# Altium PCB 主板PCB第3次.PcbDoc
Units mil, origin at the board's own origin, x right, y up, seen from the top; angles counter-clockwise.
Board outline 10400 x 7050 mil, 2 copper layers (Top Layer, Bottom Layer); 77 components, 91 nets, 401 pads, 33 vias.
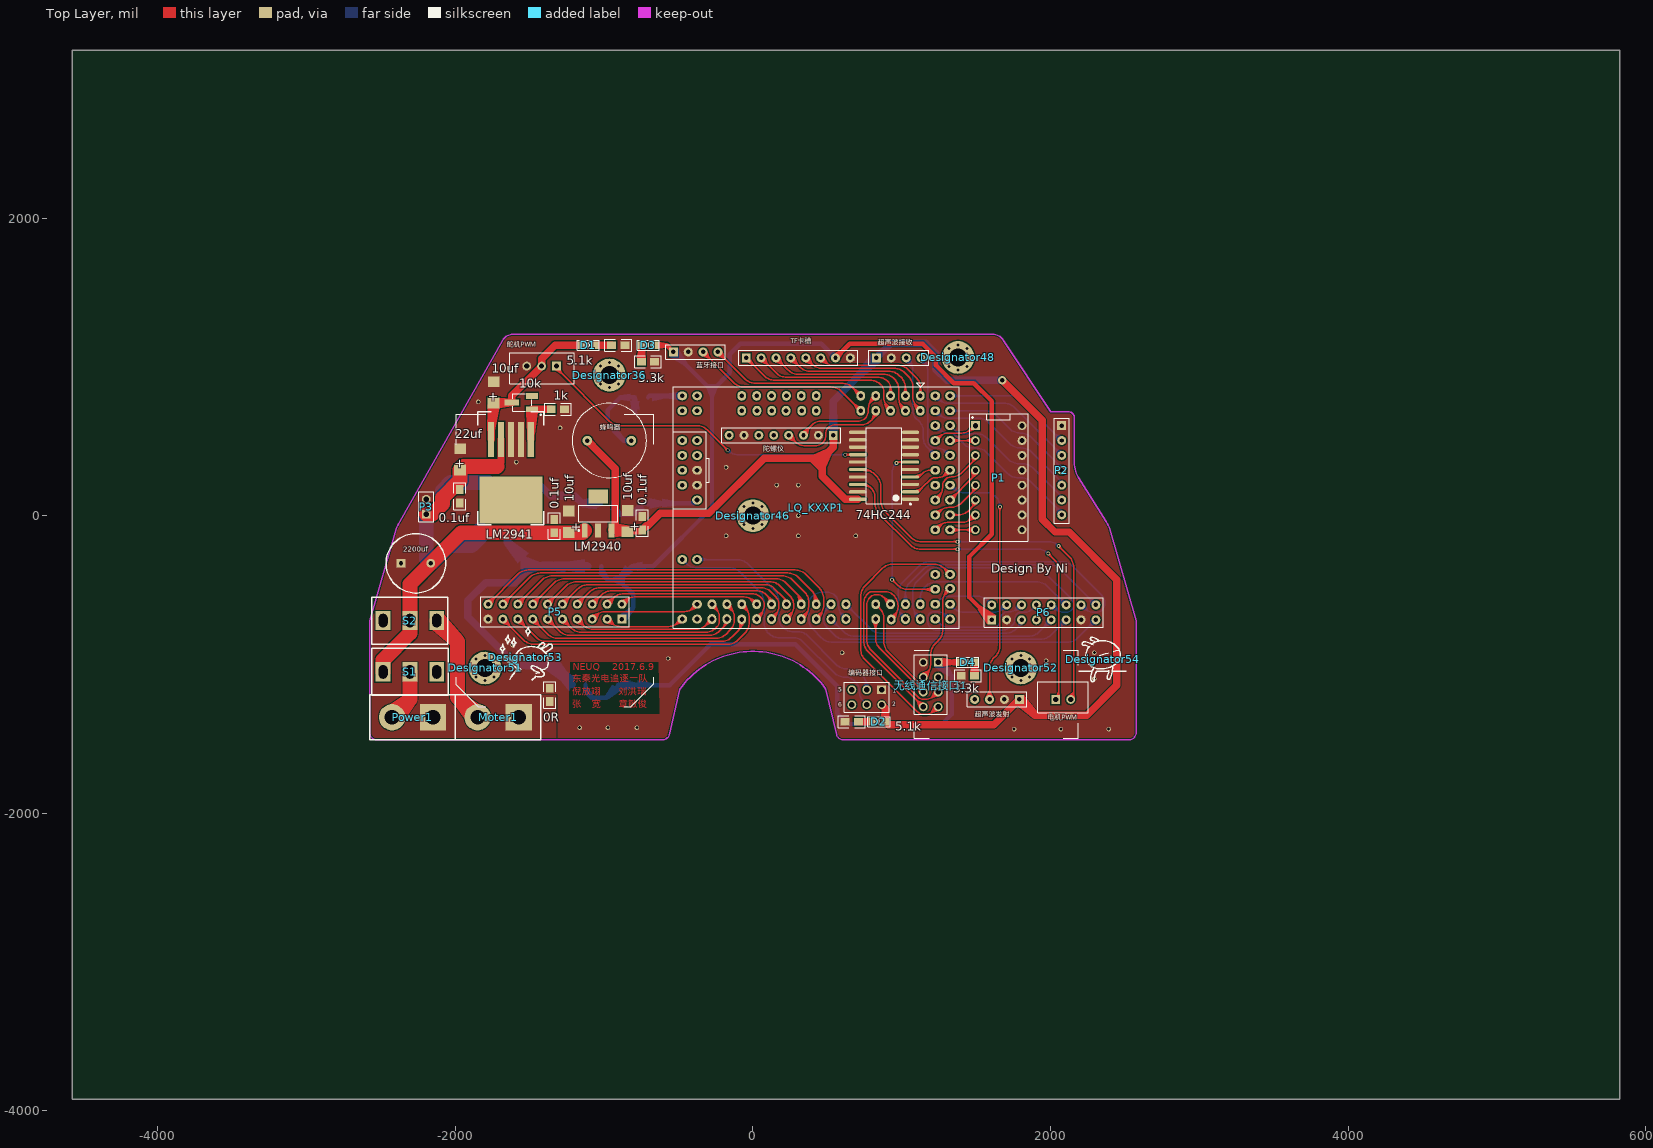
[diagram p0: Top Layer view]
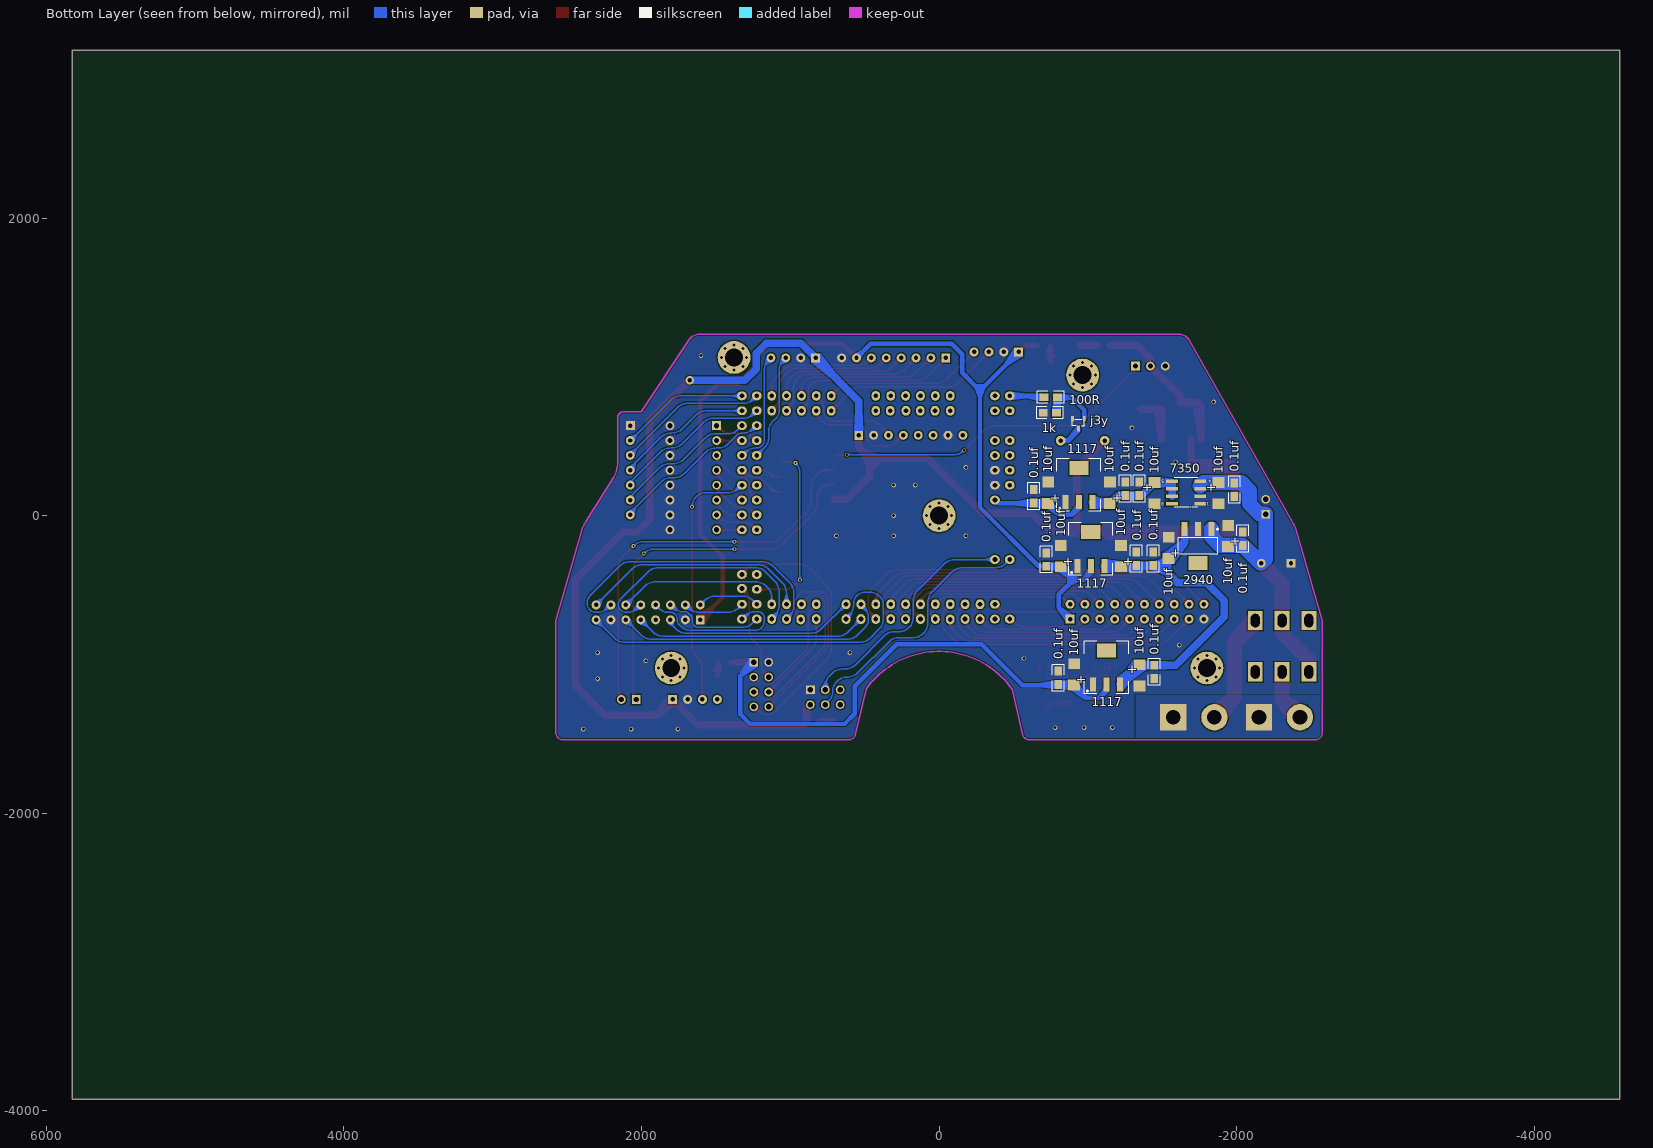
[diagram p1: Bottom Layer view, seen from below]

## Layer stack, top to bottom
Top Solder: solder mask 0.4, Solder Resist, Dk 3.5
Top Layer: signal copper 1.4
Dielectric 1: dielectric 12.6, FR-4, Dk 4.8
Bottom Layer: signal copper 1.4
Bottom Solder: solder mask 0.4, Solder Resist, Dk 3.5

## Board outline
-4574.49,-3922.05 -4574.49,3127.95 5825.51,3127.95 5825.51,-3922.05

## Design rules (kind name [scope] priority, off if disabled: settings)
Clearance [All] p1: gap=8
ComponentClearance [All] p1: gap=0 collisioncheckmode=3 verticalgap=0 showdistances=FALSE
HoleSize [All] p1: absolutevalues=TRUE maxlimit=200 minlimit=5 maxpercent=80.000 minpercent=20.000
PlaneClearance [All] p1: clearance=10
PlaneConnect [All] p1: planeconnectstyle=Direct reliefexpansion=20 reliefentries=4 reliefconductorwidth=10 reliefairgap=10
PolygonConnect [All] p1: connectstyle=Direct reliefconductorwidth=10 reliefentries=4 polygonreliefangle="90 Angle" airgapwidth=10
RoutingVias [All] p1: holewidth=15 width=25 viastyle="Through Hole" minholewidth=5 minwidth=10 maxholewidth=180 maxwidth=200
ShortCircuit [InNet('No Net') vs InNet('No Net')] p1: allowed=TRUE
SilkToSilkClearance [All] p1: silktosilkclearance=0
SolderMaskExpansion [All] p1: expansion=4
Width [All] p1: maxlimit=200 minlimit=8 preferedwidth=10
24 further rules are at their usual default settings.

## Classes and differential pairs
component class 主板原理图第3次: 0.1uf 0R 1k 3.3k 5.1k 10k 10uf 22uf 74HC244 100R 1117 2200uf 2940 7350 D1 D2 D3 D4 j3y LM2940 LM2941 LQ_KXXP1 Moter1 P1 P2 P3 P5 P6 Power1 S1 S2 TF卡槽 无线通信接口1 电机PWM 编码器接口 舵机PWM 蓝牙接口 蜂鸣器 超声波发射 超声波接收 陀螺仪

## Components (designator, comment, footprint, x,y, rotation, side; value= is the part's Value field where it differs from the comment)
0.1uf "C-0.1uf" 0805 -745,-95 r90 top (schematic designator C28)
0.1uf "C-0.1uf" 0805 -1335,-25 r270 top (schematic designator C27)
0.1uf "C-0.1uf" 0805 -1440,-245 r270 bottom (schematic designator C24)
0.1uf "C-0.1uf" 0805 -2040,-110 r270 bottom (schematic designator C23)
0.1uf "C-0.1uf" 0805 -1345,135 r90 bottom (schematic designator C20)
0.1uf "C-0.1uf" 0805 -1985,130 r90 bottom (schematic designator C19)
0.1uf "C-0.1uf" 0805 -800,-1045.32 r270 bottom (schematic designator C16)
0.1uf "C-0.1uf" 0805 -1445,-1005.32 r270 bottom (schematic designator C15)
0.1uf "C-0.1uf" 0805 -720,-250 r270 bottom (schematic designator C11)
0.1uf "C-0.1uf" 0805 -1325,-245 r270 bottom (schematic designator C10)
0.1uf "C-0.1uf" 0805 -1970,85 r90 top (schematic designator C7)
0.1uf "C-0.1uf" 0805 -635,175 r270 bottom (schematic designator C5)
0.1uf "C-0.1uf" 0805 -1250,225 r270 bottom (schematic designator C4)
0R "0欧电阻" 0805 -1365,-1160 r270 top (schematic designator R1)
1k "1k" 0805 -700.01,691.68 r180 bottom (schematic designator R5)
1k "1k" 0805 -1265,715 r180 top (schematic designator R3)
3.3k "3.3k" 0805 1400,-1075 r0 top (schematic designator R9)
3.3k "5.1k" 0805 -860,1145 r180 top (schematic designator R6)
5.1k "3.3k" 0805 -660,1035 r180 top (schematic designator R8)
5.1k "4.7k" 0805 620,-1385 r0 top (schematic designator R7)
10k "10K可调电阻" 10K贴片可调电阻 -1560,760 r90 top (schematic designator R2)
10uf "C-10uf钽电容" 10uf钽电容 -840,-40 r90 top (schematic designator C26)
10uf "C-10uf钽电容" 10uf钽电容 -1235,-44 r90 top (schematic designator C25)
10uf "C-10uf钽电容" 10uf钽电容 -1545,-220 r90 bottom (schematic designator C22)
10uf "C-10uf钽电容" 10uf钽电容 -1945,-140 r90 bottom (schematic designator C21)
10uf "C-10uf钽电容" 10uf钽电容 -1445,155 r270 bottom (schematic designator C18)
10uf "C-10uf钽电容" 10uf钽电容 -1875,155 r270 bottom (schematic designator C17)
10uf "C-10uf钽电容" 10uf钽电容 -910,-1070.32 r90 bottom (schematic designator C14)
10uf "C-10uf钽电容" 10uf钽电容 -1345,-1070.32 r270 bottom (schematic designator C13)
10uf "C-22uf钽电容" C-22uf钽电容 -1740,825 r90 top (schematic designator C12)
10uf "C-10uf钽电容" 10uf钽电容 -820,-275 r90 bottom (schematic designator C9)
10uf "C-10uf钽电容" 10uf钽电容 -1225,-275 r90 bottom (schematic designator C8)
10uf "C-10uf钽电容" 10uf钽电容 -735,150 r90 bottom (schematic designator C3)
10uf "C-10uf钽电容" 10uf钽电容 -1150,150 r90 bottom (schematic designator C2)
22uf "C-22uf钽电容" C-22uf钽电容 -1965,375 r90 top (schematic designator C6)
74HC244 "74HC244" 74HC244 880,340 r180 top (schematic designator U1)
100R "100R" 0805 -705.01,795 r180 bottom (schematic designator R4)
1117 "LM1117-3.3V" LM1117 -1125,-1020.32 r90 bottom (schematic designator U5)
1117 "LM1117-3.3V" LM1117 -1020,-225 r90 bottom (schematic designator U3)
1117 "LM1117-3.3V" LM1117 -940,205 r90 bottom (schematic designator U2)
2200uf "C-470uf电解电容" C-470uF电解电容 -2265,-320 r0 top (schematic designator C1)
2940 "LM2940-TO-223-5V" lm2940-sot223 -1740,-205 r270 bottom (schematic designator U7)
7350 "TPS7350" TPS7350 -1660,155 r0 bottom (schematic designator U6)
D1 "" LED-0805 -1105,1145 r0 top
D2 "" LED-0805 845,-1385 r180 top
D3 "" LED-0805 -705,1145 r180 top
D4 "" LED-0805 1445,-985 r0 top
Designator36 "Comment" 螺丝固定过孔 -964.57,944.88 r0 top
Designator46 "Comment" 螺丝固定过孔 0,0 r0 top
Designator48 "Comment" 螺丝固定过孔 1377.95,1062.99 r0 top
Designator51 "Comment" 螺丝固定过孔 -1800,-1023.62 r0 top
Designator52 "Comment" 螺丝固定过孔 1800,-1023.62 r0 top
Designator53 "Comment" TUSIJI_2 -1530,-950 r0 top
Designator54 "Comment" TUSIJI_3 2350,-965 r0 top
j3y "QNPN" J3Y晶体管 -940,620 r0 bottom (schematic designator Q1)
LM2940 "LM2940-TO-223-5V" lm2940-sot223 -1040,15 r90 top (schematic designator U8)
LM2941 "LM2941" LM2941 -1625,310 r270 top (schematic designator U4)
LQ_KXXP1 "LQ_KXXP144-SYSVG" LQ_KXXP144-SYSVG 1125,805 r180 top
Moter1 "驱动接口" 14AWG接口x2 -1575,-1355 r180 top
P1 "拨码开关8位" 拨码开关8位 1495,605 r0 top
P2 "6位按键接口" HDR7X1 2075,605 r270 top
P3 "数码管接口" HDR2X1 -2195,10 r90 top
P5 "山外LCD" 山外LCD插座 -1995,-1285 r0 top
P6 "鹰眼、总钻风MT9V032" 总钻风MT9V032 1605,-600 r0 top
Power1 "电源接口" 14AWG接口x2 -2150,-1355 r180 top
S1 "三脚开关" 大开关 -2305,-1050 r180 top
S2 "三脚开关" 大开关 -2305,-705 r0 top
TF卡槽 "TF卡槽接口" HDR8X1 -45,1060 r0 top (schematic designator P4)
无线通信接口1 "无线通信接口" 无线通信接口 1085,-905 r270 top
电机PWM "电机接口1" 白插座2X1 2035,-1235 r0 top (schematic designator 电机接口1)
编码器接口 "编码器接口" 编码器接口 765,-1220 r180 top (schematic designator 编码器接口1)
舵机PWM "舵机接口" 白插座3X1 -1320,1005 r180 top (schematic designator 舵机接口1)
蓝牙接口 "蓝牙串口接口" 蓝牙串口接口 -535,1100 r0 top (schematic designator 蓝牙接口1)
蜂鸣器 "Buzzer" 蜂鸣器 -965,505 r0 top (schematic designator 蜂鸣器1)
超声波发射 "逐飞超声波发射接口" 逐飞超声波发射接口 1790,-1235 r180 top (schematic designator 超声波发射1)
超声波接收 "逐飞超声波接收接口" 逐飞超声波接收接口 830,1060 r0 top (schematic designator 超声波接收1)
陀螺仪 "mpu6050接口" mpu6050接口 540,540 r180 top (schematic designator 陀螺仪1)

## Footprints (in the part's own frame and the unit in brackets; to place one, negate y for a bottom-side part, rotate by r counter-clockwise, add the part's x,y. Pads: shape width x height; smd on the part's side, far side on the other; paste and mask are expansions set on the pad)
10K贴片可调电阻 [mm]
  rect 1x2 smd paste-0.025 mask+0: 1(-1.143,-1.905) 3(1.143,-1.905)
  rect 1x2.5 smd paste-0.025 mask+0: 2(0,1.524)
  silkscreen extent -1.52,-1.91 1.52,1.4
10uf钽电容 [mil]
  rect 72.99x78.74 smd: 1(-68,3) 2(75,2)
14AWG接口x2 [mm] "电源洞洞"
  rect 4.5x4.5 hole 2.5: 1(-0.015,0)
  round 4.5 hole 2.5: 2(6.985,0)
  silkscreen extent -3.81,-3.81 10.79,3.81
74HC244 [mm]
  oval 3x0.55 smd: 1(-4.525,5.842) 2(-4.525,4.572) 3(-4.525,3.302) 4(-4.525,2.032) 5(-4.525,0.762) 6(-4.525,-0.508) 7(-4.525,-1.778) 8(-4.525,-3.048) 9(-4.525,-4.318) 10(-4.525,-5.588) 11(4.475,-5.588) 12(4.475,-4.318) 13(4.475,-3.048) 14(4.475,-1.778) 15(4.475,-0.508) 16(4.475,0.762) 17(4.475,2.032) 18(4.475,3.302) 19(4.475,4.572) 20(4.475,5.842)
  silkscreen extent -4.65,-6.37 3,6.79, body extent -3.82,-6.38 3.77,6.63, height 2.64
0805 [mil]
  rect 60x50 smd: 1(0,0) 2(90,0)
  silkscreen extent -45,-40 135,40
C-22uf钽电容 [mil]
  rect 72.99x78.74 smd: 1(-68,3) 2(75,2)
C-470uF电解电容 [mil] "可用于470uF,1000uF,2200uF"
  rect 60x60 hole 30: 1(-100,0)
  round 60 hole 30: 2(100,0)
  silkscreen extent -200,-200 200,200
HDR2X1 [mm] "Connector; Header; 2 Position"
  rect 1.5x1.5 hole 0.9: 1(0,0)
  round 1.5 hole 0.9: 2(2.54,0)
  silkscreen extent -1.27,-1.27 3.81,1.27
HDR7X1 [mil]
  rect 60x60 hole 30: 1(0,0)
  round 60 hole 30: 2(100,0) 3(200,0) 4(300,0) 5(400,0) 6(500,0) 7(600,0)
  silkscreen extent -50,-50 655,50
HDR8X1 [mil]
  rect 60x60 hole 30: 1(0,0)
  round 60 hole 30: 2(100,0) 3(200,0) 4(300,0) 5(400,0) 6(500,0) 7(600,0) 8(700,0)
  silkscreen extent -50,-50 750,50
J3Y晶体管 [mm]
  rect 0.5x1 smd: 1(-0.9,-0.8) 2(1.1,-0.8) 3(0.1,0.9)
  silkscreen extent -0.87,-0.63 1.15,0.45
LED-0805 [mm]
  rect 1.4x1.27 smd: 1(-1.143,0) 2(1.067,0)
  silkscreen extent -1.94,-0.89 1.87,0.89
LM1117 [mm]
  rect 2.4x1 smd: 1(-2.9,2.3) 2(-2.9,0) 3(-2.9,-2.3)
  rect 2.4x3.3 smd: 4(2.9,0)
  silkscreen extent -4.47,-3.76 4.47,3.76, body extent -1.85,-3.35 1.85,3.35, height 1.8
lm2940-sot223 [mm]
  rect 2.4x1 smd: 1(-2.9,2.3) 2(-2.9,0) 3(-2.9,-2.3)
  rect 2.4x3.3 smd: 4(2.9,0)
  silkscreen extent -3.02,-3.35 1.4,3.47, body extent -1.85,-3.35 1.85,3.35, height 1.8
LM2941 [mm]
  rect 6x1.07 smd: 1(-5.133,3.376) 2(-5.133,1.676) 3(-5.133,-0.024) 4(-5.133,-1.724) 5(-5.133,-3.424)
  rect 8x10.8 smd: 6(5.225,-0.024)
  silkscreen extent -9.86,-5.66 9.44,5.61, body extent -4.65,-5.23 4.24,5.18, height 4.65
LQ_KXXP144-SYSVG [mil]
  oval 59x66 hole 32: 1(0,0) 2(0,100) 3(100,0) 4(100,100) 5(200,0) 6(200,100) 7(300,0) 8(300,100) 9(400,0) 10(400,100) 15(700,0) 16(700,100) 17(800,0) 18(796.85,100) 19(900,0) 20(902.36,100) 21(1000,0) 22(998.82,100) 23(1100,0) 24(1097.64,100) 25(1200,0) 26(1200.39,100) 63(1400,1500) 64(1400,1400) 65(1300,1500) 66(1300,1400) 67(1200,1501.97) 68(1200,1400) 69(1100,1500) 70(1100,1400) 71(1000,1500) 72(1000,1400) 73(900,1500) 74(900,1400) 75(800,1500) 76(800,1400) 77(700,1500) 78(700,1400) 79(600,1500) 80(600,1400) 81(500,1500) 82(500,1400) 85(300,1500) 86(300,1400) 87(194.88,1502.36) 88(200,1400) 89(100,1500) 90(100,1400) 91(0,1500) 92(0,1400)
  oval 66x59 hole 32: 31(1500,0) 32(1600,0) 33(1500,100) 34(1600,100) 37(1500,300) 38(1600,300) 39(1500,400.79) 40(1600,400) 41(1500,500) 42(1600,500.39) 43(1500,600) 44(1600,600) 45(1500,700) 53(1500,1100) 54(1600,1100) 59(1500,1400) 61(1500,1500) 62(1600,1500) 93(-100,1500) 94(-200,1500) 95(-100,1400) 96(-200,1400) 97(-100,1300) 98(-200,1294.09) 99(-100,1200) 100(-200,1200) 105(-100,899.61) 106(-200,900.39) 107(-100,800) 108(-200,800) 109(-100,700) 110(-200,700) 111(-100,600) 112(-200,600) 113(-100,500) 114(-200,500) 115(-100,400) 116(-200,400) 117(-100,300) 118(-200,300) 119(-100,200) 120(-200,200) 121(-100,100) 122(-200,100) 123(-100,0) 124(-200,0)
  silkscreen extent -260,-87 1660,1560
mpu6050接口 [mil]
  rect 60x60 hole 30: 1(0,0)
  round 60 hole 30: 2(100,0) 3(200,0) 4(300,0) 5(400,0) 6(500,0) 7(600,0) 8(700,0)
  silkscreen extent -50,-50 750,50
TPS7350 [mm]
  rect 2x0.6 smd paste-0.025 mask+0: 1(-2.4,1.905) 2(-2.4,0.635) 3(-2.4,-0.635) 4(-2.4,-1.905) 5(2.4,-1.905) 6(2.4,-0.635) 7(2.4,0.635) 8(2.4,1.905)
  silkscreen extent -2,-2.5 2,2.5
TUSIJI_2 [mil] "TSJ"
  silkscreen extent -168,-155 182,205
TUSIJI_3 [mil] "TSJ"
  silkscreen extent -159,-150 158,149
大开关 [mil]
  rect 100x130 hole 60 slot 90 at 90 deg: 1(-180,0) 2(0,0) 3(180,0)
  silkscreen extent -257,-159 255,155
山外LCD插座 [mil]
  rect 60x60 hole 30: 1(1115,590)
  round 60 hole 30: 2(1015,590) 3(915,590) 4(815,590) 5(715,590) 6(615,590) 7(515,590) 8(415,590) 9(315,590) 10(215,590) 11(215,690) 12(315,690) 13(415,690) 14(515,690) 15(615,690) 16(715,690) 17(815,690) 18(915,690) 19(1015,690) 20(1115,690)
  silkscreen extent 0,0 1330,1965
总钻风MT9V032 [mil]
  rect 60x60 hole 30: 1(0,-100)
  round 60 hole 30: 2(100,-100) 3(200,-100) 4(300,-100) 5(400,-100) 6(500,-100) 7(600,-100) 8(700,-100) 9(700,0) 10(600,0) 11(500,0) 12(400,0) 13(300,0) 14(200,0) 15(100,0) 16(0,0)
  silkscreen extent -50,-150 750,50
拨码开关8位 [mm]
  rect 1.5x1.5 hole 0.9: 1(0,0)
  round 1.5 hole 0.9: 2(0,-2.54) 3(0,-5.08) 4(0,-7.62) 5(0,-10.16) 6(0,-12.7) 7(0,-15.24) 8(0,-17.78) 9(7.958,-17.786) 10(7.958,-15.246) 11(7.958,-12.706) 12(7.958,-10.166) 13(7.958,-7.626) 14(7.958,-5.086) 15(7.958,-2.546) 16(7.958,-0.006)
  silkscreen extent -1.04,-19.71 8.96,1.99
无线通信接口 [mm]
  rect 1.5x1.5 hole 0.9: 1(2.032,4.064)
  round 1.5 hole 0.9: 2(4.572,4.064) 3(7.112,4.064) 4(9.652,4.052) 5(9.652,1.512) 6(7.112,1.524) 7(4.572,1.524) 8(2.032,1.524)
  silkscreen extent 0,0 14.99,27.94
白插座2X1 [mm] "Connector; Header; 3 Position"
  rect 1.5x1.5 hole 0.9: 1(0,0)
  round 1.5 hole 0.9: 2(2.54,0)
  silkscreen extent -3.05,-2.29 5.59,3.05
白插座3X1 [mm] "Connector; Header; 3 Position"
  rect 1.5x1.5 hole 0.9: 1(0,0)
  round 1.5 hole 0.9: 2(2.54,0) 3(5.08,0)
  silkscreen extent -3,-2.27 8,3
编码器接口 [mm]
  rect 1.5x1.5 hole 0.9: 1(-2.54,-1.27)
  round 1.5 hole 0.9: 2(-2.54,1.27) 3(0,-1.27) 4(0,1.27) 5(2.54,-1.27) 6(2.54,1.27)
  silkscreen extent -3.81,-2.54 3.81,2.54
蓝牙串口接口 [mil]
  rect 60x60 hole 30: 1(0,0)
  round 60 hole 30: 2(100,0) 3(200,0) 4(300,0)
  silkscreen extent -50,-50 350,50
蜂鸣器 [mil]
  round 65 hole 30: 1(-148,-0.98) 2(148,-0.98)
  silkscreen extent -250,-250 250,250
螺丝固定过孔 [mil] "螺丝固定过孔"
  round 30 hole 20: 1(-85,0) 1(-60,-60) 1(-60,60) 1(0,-85) 1(0,85) 1(60,-60) 1(60,60) 1(85,0)
  round 220 hole 120 unplated: 1(0,0)
逐飞超声波发射接口 [mil]
  rect 60x60 hole 30: 1(0,0)
  round 60 hole 30: 2(100,0) 3(200,0) 4(300,0)
  silkscreen extent -50,-50 350,50
逐飞超声波接收接口 [mil]
  rect 60x60 hole 30: 1(0,0)
  round 60 hole 30: 2(100,0) 3(200,0) 4(300,0)
  silkscreen extent -50,-50 350,50

## Part data
0.1uf 0.1uf 0.1uf 0.1uf 0.1uf 0.1uf 0.1uf 0.1uf 0.1uf 0.1uf 0.1uf 0.1uf 0.1uf: "Capacitor"
0R 1k 1k 3.3k 3.3k 5.1k 5.1k 100R: library part R-0805
10k: library part 可调电阻
10uf 10uf 10uf 10uf 10uf 10uf 10uf 10uf 10uf 10uf 10uf 10uf 10uf 22uf: "Polarized Capacitor (Axial)"
74HC244: "内置三态门 用于隔离"
1117 1117 1117: library part LM1117
2200uf: "Polarized Capacitor (Surface Mount)"
2940: library part LM2940-TO-223
D1 D2 D3 D4: library part 发光二极管, "发光二极管"
j3y: library part dynatron, "NPN型三极管"
LM2940: library part LM2940
Moter1: library part 电源接口
P2: library part Header7X1, "Header, 7-Pin"
P3 电机PWM: library part Header2X1, "Header, 2-Pin, Right Angle"
P5 无线通信接口1: "Header, 4-Pin, Dual row"
P6: library part 总钻风MT9V032, "Header, 4-Pin, Dual row"
TF卡槽: library part Header8X1, "Header, 8-Pin"
舵机PWM: library part Header3X1, "Header, 3-Pin"
蓝牙接口 超声波发射 超声波接收: "Header, 4-Pin"
蜂鸣器: "Magnetic Transducer Buzzer"
陀螺仪: "Header, 8-Pin"

## Via types
v1: diameter 30, hole 20, Top Layer to Bottom Layer, 23 vias
v2: diameter 25, hole 15, Top Layer to Bottom Layer, 9 vias
v3: diameter 55, hole 30, Top Layer to Bottom Layer, 1 vias

## Nets (pads, with @x,y where several pads share a name; then routed paths per layer and width w, separated by ;. In a path a pad name is that pad's centre, name@x,y a point inside that pad or via, vN(x,y) a via of type N, cw(c..) or ccw(c..) an arc to the next point about the centre after c; other vN are vias at no path point)
1PWM+: 74HC244.18 电机PWM.1 | length 2533.9
  Top Layer w10: 74HC244.18 734.64,210 cw(c734.64,124.64) 795,185 cw(c734.64,124.64) 820,124.64 820,81.42 ccw(c920,81.42) 849.29,10.71 1055.71,-195.71 ccw(c1126.42,-125) 1126.42,-225 v2(1375,-225) ; v2(1984.29,-254.29) 2025.71,-295.71 cw(c1955,-366.42) 2055,-366.42 2055,-1186.72 cw(c1986.72,-1186.72) 电机PWM.1
  Bottom Layer w10: v2(1375,-225) 1913.58,-225 cw(c1913.58,-325) v2(1984.29,-254.29)
1PWM-: 74HC244.16 电机PWM.2 | length 2720.9
  Top Layer w10: 74HC244.16 743.58,310 cw(c743.58,210) 814.29,280.71 830.71,264.29 cw(c760,193.58) 860,193.58 860,96.42 ccw(c960,96.42) 889.29,25.71 1060.71,-145.71 ccw(c1131.42,-75) 1131.42,-175 v2(1375,-175) ; v2(2054.29,-204.29) 2125.71,-275.71 cw(c2055,-346.42) 2155,-346.42 2155,-1186.72 cw(c2086.72,-1186.72) 电机PWM.2
  Bottom Layer w10: v2(1375,-175) 1983.58,-175 cw(c1983.58,-275) v2(2054.29,-204.29)
3.3V_1: 0.1uf.2@-720,-340 10uf.1@-817,-343 1117.2@-1020,-339.17 D3.1 P5.1 P6.1 TF卡槽.7 蓝牙接口.1 | length 6592.1
  Top Layer w30: D3.1 -580,1145 蓝牙接口.1 ; TF卡槽.7 650,1155 1140,1155 1230,1065 1230,1010 1350,890 1485,890 1605,770 1605,-125 1455,-275 1455,-550 P6.1
  Bottom Layer w30: 1117.2@-1020,-339.17 -1020,-385 -975,-430 -904,-430 ; P5.1 -805,-620 -805,-529 -904,-430 ; 蓝牙接口.1 -275,840 ; TF卡槽.7 460,1155 -85,1155 -155,1085 -155,960 -275,840 ; -904,-430 -817,-343 -723,-343 -720,-340 -670,-340 -275,55 -275,840
3.3V_2: 0.1uf.2@-800,-1135.32 10uf.1@-907,-1138.32 1117.2@-1125,-1134.49 D4.1 无线通信接口1.1 | length 3577.5
  Top Layer w30: 无线通信接口1.1 D4.1
  Bottom Layer w30: 1117.2@-1125,-1134.49 -1125,-1180 -1080,-1225 -985,-1225 -907,-1147 -907,-1138.32 -558.31,-1138.32 -285,-865 285,-865 566.49,-1146.49 566.49,-1331.49 635,-1400 1270,-1400 1335,-1335 1335,-1075 无线通信接口1.1
5V_1: 0.1uf.1@-1345,135 0.1uf.2@-1250,135 10uf.1@-1147,82 10uf.1@-1448,223 1117.3@-1030.55,90.83 7350.5 7350.6 7350.7 | length 688.7
  Bottom Layer w50: 7350.7 7350.6 -1565.51,220.75 -1563.26,223 -1448,223 -1360,135 -1345,135 -1250,135 -1200,135 -1147,82 -1039.38,82 1117.3@-1030.55,90.83
5V_2: 0.1uf.1@-745,-95 10uf.1@-843,-108 74HC244.20 D2.1 LM2940.3 编码器接口.2 蜂鸣器.1 超声波发射.1 超声波接收.1 陀螺仪.1 | length 8916.9
  Top Layer w50: 蜂鸣器.1 -925,316.02 -925,-74.72 LM2940.3 -749.17,-99.17 -745,-95 -718,-68 -706.33,-68 -623.33,15 -295,15 75,385 465,385 ; 陀螺仪.1 540,460 465,385 ; 74HC244.20 620,110 465,265 465,385 ; 编码器接口.2 889.99,-1294.99 D2.1 909.99,-1405 1620,-1405 超声波发射.1 1895,-1340 2245,-1340 2445,-1140 2445,-430 2125,-110 2030,-110 1945,-25 1945,640 v3(1675,910)
  Bottom Layer w50: 陀螺仪.1 540,770 超声波接收.1 930,1160 1160,1160 1230,1090 1230,985 1305,910 v3(1675,910)
5V_3: 0.1uf.1@-1445,-1005.32 0.1uf.2@-1325,-335 0.1uf.2@-1440,-335 10uf.1@-1222,-343 10uf.1@-1348,-1002.32 10uf.1@-1542,-288 1117.3@-1110.55,-339.17 1117.3@-1215.55,-1134.49 2940.3 | length 2211.8
  Bottom Layer w50: 2940.3 -1649.45,-180.55 -1542,-288 -1490.83,-339.17 ; 1117.3@-1215.55,-1134.49 -1344.72,-1005.32 -1445,-1005.32 -1589.68,-1005.32 -1915,-680 -1915,-570 -1795,-450 -1601.65,-450 -1490.83,-339.17 ; 1117.3@-1110.55,-339.17 -1490.83,-339.17
6V: 10k.2 10uf.1@-1743,757 D1.1 LM2941.5 舵机PWM.2 | length 1061.2
  Top Layer w50: LM2941.5 -1759.8,740.2 -1743,757 -1740,760 10k.2 -1620,805 舵机PWM.2 -1420,1055 -1330,1145 D1.1
7.2V: 0.1uf.2@-1335,-115 0.1uf.2@-1970,175 0.1uf.2@-1985,220 0.1uf.2@-2040,-200 10uf.1@-1238,-112 10uf.1@-1878,223 10uf.1@-1942,-208 22uf.1 2200uf.2 2940.1 7350.3 7350.4 LM2940.1 LM2941.4 P3.1 S1.3 S2.2 | length 4245.8
  Top Layer w50: -1720,330 -1692.87,357.13 LM2941.4
  Top Layer w100: S1.3 -2485,-970 -2305,-790 S2.2 -2305,-460 2200uf.2 -1960,-115 -1335,-115 -1146.38,-115 LM2940.1 ; P3.1 -2155,10 -2085,80 -2085,120 -1968,237 22uf.1 -1945,330 -1720,330
  Bottom Layer w100: 2940.1 -1830.55,-140.55 -1890,-200 -2040,-200 -2160,-320 2200uf.2 -2195,-290 P3.1 -2155,10 -2085,80 -2085,170 -2032,223 -1878,223 -1777.68,223 -1754.49,199.81
A10: LQ_KXXP1.53 编码器接口.3 | length 1618.6
  Bottom Layer w10: LQ_KXXP1.53 -106.42,-295 cw(c-106.42,-395) -35.71,-324.29 145.71,-505.71 cw(c75,-576.42) 175,-576.42 175,-688.64 ccw(c262.78,-688.64) 200.71,-750.71 ccw(c271.42,-680) 271.42,-780 305,-780 cw(c305,-864.5) 364.75,-804.75 560.71,-1000.71 ccw(c631.42,-930) 631.42,-1030 648.58,-1030 cw(c648.58,-1130) 719.29,-1059.29 735.71,-1075.71 cw(c665,-1146.42) 765,-1146.42 编码器接口.3
A11: LQ_KXXP1.54 编码器接口.4 | length 1775.1
  Bottom Layer w10: LQ_KXXP1.54 -449.29,-320.71 ccw(c-378.58,-250) -378.58,-350 -156.42,-350 cw(c-156.42,-450) -85.71,-379.29 45.71,-510.71 cw(c-25,-581.42) 75,-581.42 75,-718.58 ccw(c175,-718.58) 104.29,-789.29 105.71,-790.71 ccw(c176.42,-720) 176.42,-820 268.58,-820 cw(c268.58,-920) 339.29,-849.29 545.71,-1055.71 ccw(c616.42,-985) 616.42,-1085 620,-1085 cw(c620,-1169.5) 679.75,-1109.75 690.25,-1120.25 cw(c630.5,-1180) 715,-1180 ccw(c811.57,-1180) 743.28,-1248.28 编码器接口.4
A16: LQ_KXXP1.59 P5.3 | length 737.8
  Top Layer w10: P5.3 -1059.29,-674.29 cw(c-988.58,-745) -988.58,-645 -466.42,-645 ccw(c-466.42,-545) -395.71,-615.71 LQ_KXXP1.59
A19: LQ_KXXP1.62 P5.2 | length 537.8
  Top Layer w10: P5.2 -959.29,-715.71 ccw(c-888.58,-645) -888.58,-745 -566.42,-745 ccw(c-566.42,-645) -495.71,-715.71 LQ_KXXP1.62
A24: LQ_KXXP1.64 P5.5 | length 1255.3
  Top Layer w10: P5.5 -1219.29,-755.71 ccw(c-1148.58,-685) -1148.58,-785 -321.42,-785 ccw(c-321.42,-685) -250.71,-755.71 -242.68,-747.68 ccw(c-285.36,-705) -225,-705 -225,-686.42 ccw(c-325,-686.42) -254.29,-615.71 LQ_KXXP1.64
A25: LQ_KXXP1.63 P5.4 | length 954.4
  Top Layer w10: P5.4 -1139.29,-735.71 ccw(c-1068.58,-665) -1068.58,-765 -386.42,-765 ccw(c-386.42,-665) -315.71,-735.71 LQ_KXXP1.63
A26: LQ_KXXP1.66 P5.7 | length 1592.6
  Top Layer w10: P5.7 -1379.29,-795.71 ccw(c-1308.58,-725) -1308.58,-825 -251.42,-825 ccw(c-251.42,-725) -180.71,-795.71 -154.29,-769.29 ccw(c-225,-698.58) -125,-698.58 -125,-686.42 ccw(c-225,-686.42) -154.29,-615.71 LQ_KXXP1.66
A27: LQ_KXXP1.65 P5.6 | length 1302
  Top Layer w10: P5.6 -1299.29,-775.71 ccw(c-1228.58,-705) -1228.58,-805 -296.42,-805 ccw(c-296.42,-705) -225.71,-775.71 -196.21,-746.21 ; -196.21,-746.21 ccw(c-247.43,-695) LQ_KXXP1.65
A28: LQ_KXXP1.68 P5.9 | length 1937.4
  Top Layer w10: P5.9 -1539.29,-835.71 ccw(c-1468.58,-765) -1468.58,-865 -171.42,-865 ccw(c-171.42,-765) -100.71,-835.71 -54.29,-789.29 ccw(c-125,-718.58) -25,-718.58 -25,-686.42 ccw(c-125,-686.42) -54.29,-615.71 LQ_KXXP1.68
A29: LQ_KXXP1.67 P5.8 | length 1646
  Top Layer w10: P5.8 -1459.97,-815.03 ccw(c-1389.26,-744.31) -1389.26,-844.31 -210.74,-844.32 ccw(c-210.74,-744.31) -140.03,-815.03 -104.29,-779.29 ccw(c-175,-708.58) -75,-708.58 LQ_KXXP1.67
B0: LQ_KXXP1.70 P5.20 | length 937.8
  Top Layer w10: P5.20 -859.29,-574.29 cw(c-788.58,-645) -788.58,-545 -66.42,-545 cw(c-66.42,-645) 4.29,-574.29 LQ_KXXP1.70
B1: LQ_KXXP1.69 P5.19 | length 1233.5
  Top Layer w10: P5.19 -939.29,-554.29 cw(c-868.58,-625) -868.58,-525 -5.36,-525 cw(c-5.36,-610.36) 55,-550 57.32,-552.32 cw(c14.64,-595) 75,-595 75,-603.58 cw(c-25,-603.58) 45.71,-674.29 LQ_KXXP1.69
B2: LQ_KXXP1.72 P5.18 | length 1285.4
  Top Layer w10: P5.18 -1019.29,-534.29 cw(c-948.58,-605) -948.58,-505 23.58,-505 cw(c23.58,-605) 94.29,-534.29 103.79,-543.79 ; 103.79,-543.79 cw(c52.57,-595) LQ_KXXP1.72
B3: LQ_KXXP1.71 P5.17 | length 1568.2
  Top Layer w10: P5.17 -1099.29,-514.29 cw(c-1028.58,-585) -1028.58,-485 60,-485 cw(c60,-569.5) 119.75,-509.75 147.72,-537.72 cw(c81.86,-603.58) 175,-603.58 cw(c75,-603.58) 145.71,-674.29 LQ_KXXP1.71
B4: LQ_KXXP1.74 P5.16 | length 1617.3
  Top Layer w10: P5.16 -1179.29,-494.29 cw(c-1108.58,-565) -1108.58,-465 90,-465 cw(c90,-537.43) 141.21,-486.21 207.32,-552.32 cw(c164.64,-595) LQ_KXXP1.74
B5: LQ_KXXP1.73 P5.15 | length 1900.8
  Top Layer w10: P5.15 -1259.29,-474.29 cw(c-1188.58,-545) -1188.58,-445 115,-445 cw(c115,-541.57) 183.28,-473.28 247.72,-537.72 cw(c181.86,-603.58) 275,-603.58 cw(c175,-603.58) 245.71,-674.29 LQ_KXXP1.73
B6: LQ_KXXP1.76 P5.14 | length 1957.2
  Top Layer w10: P5.14 -1339.29,-454.29 cw(c-1268.58,-525) -1268.58,-425 160,-425 cw(c160,-509.5) 219.75,-449.75 296.72,-526.72 cw(c228.43,-595) LQ_KXXP1.76
B7: LQ_KXXP1.75 P5.13 | length 2248.1
  Top Layer w10: P5.13 -1419.29,-434.29 cw(c-1348.58,-505) -1348.58,-405 198.58,-405 cw(c198.58,-505) 269.29,-434.29 345.71,-510.71 cw(c275,-581.42) 375,-581.42 375,-603.58 cw(c275,-603.58) 345.71,-674.29 LQ_KXXP1.75
B8: LQ_KXXP1.78 P5.12 | length 2301.2
  Top Layer w10: P5.12 -1499.29,-414.29 cw(c-1428.58,-485) -1428.58,-385 233.58,-385 cw(c233.58,-485) 304.29,-414.29 395.71,-505.71 cw(c325,-576.42) 425,-576.42 LQ_KXXP1.78
B9: LQ_KXXP1.77 P5.11 | length 2595.9
  Top Layer w10: P5.11 -1579.29,-394.29 cw(c-1508.58,-465) -1508.58,-365 283.58,-365 cw(c283.58,-465) 354.29,-394.29 445.71,-485.71 cw(c375,-556.42) 475,-556.42 475,-603.58 cw(c375,-603.58) 445.71,-674.29 LQ_KXXP1.77
BUZZER: 100R.1 LQ_KXXP1.32 | length 234.1
  Bottom Layer w30: 100R.1 -695.01,805 LQ_KXXP1.32
C0: LQ_KXXP1.90 P6.9 | length 1556.1
  Bottom Layer w10: LQ_KXXP1.90 1025,-521.42 cw(c1125,-521.42) 1054.29,-450.71 1145.71,-359.29 cw(c1216.42,-430) 1216.42,-330 1993.58,-330 cw(c1993.58,-430) 2064.29,-359.29 P6.9
C1: LQ_KXXP1.89 P6.10 | length 2022.1
  Bottom Layer w10: LQ_KXXP1.89 1004.29,-674.29 cw(c1075,-603.58) 975,-603.58 975,-521.42 cw(c1075,-521.42) 1004.29,-450.71 1115.71,-339.29 cw(c1186.42,-410) 1186.42,-310 2078.58,-310 cw(c2078.58,-410) 2149.29,-339.29 2337.57,-527.57 cw(c2271.36,-593.79) 2365,-593.79 cw(c2313.79,-593.79) 2350,-630 cw(c2301.72,-581.72) 2301.72,-650 2296.42,-650 cw(c2296.42,-550) 2225.71,-620.71 P6.10
C2: LQ_KXXP1.92 P6.11 | length 1143.2
  Bottom Layer w10: LQ_KXXP1.92 1125,-551.42 cw(c1225,-551.42) 1154.29,-480.71 1160.71,-474.29 cw(c1231.42,-545) 1231.42,-445 1908.58,-445 cw(c1908.58,-545) 1979.29,-474.29 P6.11
C3: LQ_KXXP1.91 P6.12 | length 1669
  Bottom Layer w10: LQ_KXXP1.91 1104.29,-674.29 cw(c1175,-603.58) 1075,-603.58 1075,-511.42 cw(c1175,-511.42) 1104.29,-440.71 1170.25,-374.75 cw(c1230,-434.5) 1230,-350 1888.58,-350 cw(c1888.58,-450) 1959.29,-379.29 2138.18,-558.18 cw(c2097.57,-598.79) 2155,-598.79 cw(c2103.79,-598.79) 2140,-635 cw(c2103.79,-598.79) 2103.79,-650 2096.42,-650 cw(c2096.42,-550) 2025.71,-620.71 P6.12
C4: LQ_KXXP1.94 P6.13 | length 1061.1
  Bottom Layer w10: LQ_KXXP1.94 1304.29,-674.29 ccw(c1233.58,-745) 1233.58,-645 1215,-645 ccw(c1215,-681.21) 1189.39,-655.61 1185,-660 ccw(c1209.14,-684.14) 1175,-684.14 1175,-710 ccw(c1235.36,-710) 1192.68,-752.68 1195,-755 ccw(c1231.21,-718.79) 1231.21,-770 1668.58,-770 ccw(c1668.58,-670) 1739.29,-740.71 1742.32,-737.68 ccw(c1699.64,-695) 1760,-695 cw(c1808.28,-695) 1774.14,-660.86 1775,-660 cw(c1799.14,-684.14) 1799.14,-650 1820,-650 ccw(c1820,-565.5) 1879.75,-625.25 P6.13
C5: LQ_KXXP1.93 P6.14 | length 677.2
  Bottom Layer w10: LQ_KXXP1.93 1250.71,-720.71 ccw(c1321.42,-650) 1321.42,-750 1620.86,-750 ccw(c1620.86,-715.86) 1645,-740 ccw(c1608.79,-703.79) 1660,-703.79 1660,-690 cw(c1684.14,-690) 1667.07,-672.93 1685,-655 cw(c1709.14,-679.14) 1709.14,-645 1725,-645 ccw(c1725,-560.5) 1784.75,-620.25 P6.14
C6: LQ_KXXP1.96 P6.15 | length 414.9
  Bottom Layer w10: LQ_KXXP1.96 1350.71,-620.71 ccw(c1421.42,-550) 1421.42,-650 1613.58,-650 ccw(c1613.58,-550) 1684.29,-620.71 P6.15
C7: LQ_KXXP1.95 P6.16 | length 419
  Bottom Layer w10: LQ_KXXP1.95 1250.71,-569.29 cw(c1321.42,-640) 1321.42,-540 1503.58,-540 cw(c1503.58,-640) 1574.29,-569.29 P6.16
C9: 74HC244.6 LQ_KXXP1.97 | length 1200.1
  Top Layer w10: v2(935,-430) 970.71,-465.71 ccw(c1041.42,-395) 1041.42,-495 LQ_KXXP1.97 ; v2(964.29,354.29) cw(c978.08,340.5) 978.08,360 74HC244.6
  Bottom Layer w10: v2(935,-430) 935,283.58 cw(c1035,283.58) v2(964.29,354.29)
C16: LQ_KXXP1.106 P1.8 | length 170.1
  Top Layer w10: LQ_KXXP1.106 cw(c1325.95,-96.34) 1325.95,-95 P1.8
C17: LQ_KXXP1.105 P1.7 | length 302.7
  Top Layer w10: LQ_KXXP1.105 1245.32,-74.29 cw(c1316.03,-145) 1316.03,-45 1403.58,-45 ccw(c1403.58,55) 1474.29,-15.71 P1.7
C18: LQ_KXXP1.108 P1.6 | length 219.2
  Top Layer w10: LQ_KXXP1.108 1378.58,5 ccw(c1378.58,105) 1449.29,34.29 1477.32,62.32 ccw(c1434.64,105) P1.6
C19: LQ_KXXP1.107 P1.5 | length 356.3
  Top Layer w10: LQ_KXXP1.107 1245.71,25.71 cw(c1316.42,-45) 1316.42,55 1328.58,55 ccw(c1328.58,155) 1399.29,84.29 1477.32,162.32 ccw(c1434.64,205) P1.5
CE: LQ_KXXP1.98 无线通信接口1.7 | length 653.3
  Top Layer w10: 无线通信接口1.7 1165.71,-1064.29 ccw(c1095,-993.58) 1195,-993.58 1195,-931.42 cw(c1295,-931.42) 1224.29,-860.71 1245.71,-839.29 ccw(c1175,-768.58) 1275,-768.58 1275,-580.52 cw(c1375,-580.52) 1304.29,-509.8 LQ_KXXP1.98
CSN: LQ_KXXP1.86 无线通信接口1.2 | length 789.1
  Top Layer w10: LQ_KXXP1.86 850.71,-620.71 cw(c780,-691.42) 880,-691.42 880,-848.58 ccw(c980,-848.58) 909.29,-919.29 1100.25,-1110.25 ccw(c1160,-1050.5) 1160,-1135 ccw(c1160,-1050.5) 1219.75,-1110.25 无线通信接口1.2
D0: LQ_KXXP1.110 P1.4 | length 267.3
  Top Layer w10: LQ_KXXP1.110 1473.79,253.79 ccw(c1422.58,305) P1.4
D1: LQ_KXXP1.109 P1.3 | length 433.6
  Top Layer w10: LQ_KXXP1.109 1245.71,125.71 ccw(c1175,196.42) 1275,196.42 1275,196.72 cw(c1343.28,196.72) 1295,245 cw(c1331.21,208.79) 1331.21,260 1333.58,260 ccw(c1333.58,360) 1404.29,289.29 1477.32,362.32 ccw(c1434.65,405) P1.3
D2: LQ_KXXP1.112 超声波发射.3 | length 1721.5
  Top Layer w10: 超声波发射.3 1590,-1026.42 cw(c1690,-1026.42) 1619.29,-955.71 1630.71,-944.29 ccw(c1560,-873.58) 1660,-873.58 v2(1660,60)
  Bottom Layer w10: LQ_KXXP1.112 1345.71,184.29 ccw(c1416.42,255) 1416.42,155 1567.22,155 cw(c1567.22,63.79) 1631.72,128.28 cw(c1563.43,60) v2(1660,60)
D4: 74HC244.2 LQ_KXXP1.114 | length 316.2
  Top Layer w10: 74HC244.2 1068.58,160 ccw(c1068.58,260) 1139.29,189.29 1190.61,240.61 cw(c1225.36,205.86) 1225.36,255 1233.58,255 ccw(c1233.58,355) 1304.29,284.29 LQ_KXXP1.114
D5: 74HC244.4 LQ_KXXP1.113 | length 178.9
  Top Layer w10: 74HC244.4 1079.64,260 ccw(c1079.64,345.36) 1140,285 cw(c1188.28,236.72) 1188.28,305 LQ_KXXP1.113
D8: LQ_KXXP1.118 P1.2 | length 170
  Top Layer w10: LQ_KXXP1.118 P1.2
D9: LQ_KXXP1.117 P1.1 | length 302.8
  Top Layer w10: LQ_KXXP1.117 1245.71,525.71 cw(c1316.42,455) 1316.42,555 1403.58,555 ccw(c1403.58,655) 1474.29,584.29 P1.1
D10: LQ_KXXP1.120 P2.6 | length 949.7
  Bottom Layer w10: LQ_KXXP1.120 1350.71,579.29 ccw(c1421.42,650) 1421.42,550 1505,550 cw(c1505,453.43) 1573.28,521.72 1715.71,379.29 ccw(c1786.42,450) 1786.42,350 1808.58,350 cw(c1808.58,250) 1879.29,320.71 2060.86,139.14 cw(c2026.72,105) P2.6
D11: LQ_KXXP1.119 P2.7 | length 1081.9
  Bottom Layer w10: LQ_KXXP1.119 1245.71,584.29 ccw(c1316.42,655) 1316.42,555 cw(c1316.42,486.01) 1365.21,534.79 1420.25,479.75 ccw(c1480,539.5) 1480,455 1498.58,455 cw(c1498.58,355) 1569.29,425.71 1710.71,284.29 ccw(c1781.42,355) 1781.42,255 1798.58,255 cw(c1798.58,155) 1869.29,225.71 2064.39,30.61 cw(c2038.79,5) P2.7
D12: LQ_KXXP1.122 P2.4 | length 910
  Bottom Layer w10: LQ_KXXP1.122 1563.58,705 cw(c1563.58,605) 1634.29,675.71 1725.71,584.29 ccw(c1796.42,655) 1796.42,555 1798.58,555 cw(c1798.58,455) 1869.29,525.71 2064.39,330.61 cw(c2038.79,305) P2.4
D13: LQ_KXXP1.121 P2.5 | length 1049.5
  Bottom Layer w10: LQ_KXXP1.121 1245.71,684.29 ccw(c1316.42,755) 1316.42,655 1513.58,655 cw(c1513.58,555) 1584.29,625.71 1725.71,484.29 ccw(c1796.42,555) 1796.42,455 1803.58,455 cw(c1803.58,355) 1874.29,425.71 2060.86,239.14 cw(c2026.72,205) P2.5
D14: LQ_KXXP1.124 P2.2 | length 870
  Bottom Layer w10: LQ_KXXP1.124 1733.58,805 cw(c1733.58,705) 1804.29,775.71 P2.2
D15: LQ_KXXP1.123 P2.3 | length 1009.5
  Bottom Layer w10: LQ_KXXP1.123 1245.71,784.29 ccw(c1316.42,855) 1316.42,755 1688.58,755 cw(c1688.58,655) 1759.29,725.71 2071.46,413.54 cw(c2062.93,405) P2.3
E0: LQ_KXXP1.1 TF卡槽.6 | length 818.4
  Top Layer w10: TF卡槽.6 475.71,1039.29 ccw(c546.42,1110) 546.42,1010 973.58,1010 cw(c973.58,910) 1044.29,980.71 1095.71,929.29 cw(c1025,858.58) 1125,858.58 LQ_KXXP1.1
E1: LQ_KXXP1.2 TF卡槽.5 | length 987.7
  Top Layer w10: TF卡槽.5 395.71,1019.29 ccw(c466.42,1090) 466.42,990 948.58,990 cw(c948.58,890) 1019.29,960.71 1045.71,934.29 cw(c975,863.58) 1075,863.58 1075,796.42 ccw(c1175,796.42) 1104.29,725.71 LQ_KXXP1.2
E2: LQ_KXXP1.3 TF卡槽.4 | length 918.4
  Top Layer w10: TF卡槽.4 315.71,999.29 ccw(c386.42,1070) 386.42,970 913.58,970 cw(c913.58,870) 984.29,940.71 995.71,929.29 cw(c925,858.58) 1025,858.58 LQ_KXXP1.3
E3: LQ_KXXP1.4 TF卡槽.3 | length 1081.8
  Top Layer w10: TF卡槽.3 235.71,979.29 ccw(c306.42,1050) 306.42,950 878.58,950 cw(c878.58,850) 949.29,920.71 950.71,919.29 cw(c880,848.58) 980,848.58 980,791.42 ccw(c1080,791.42) 1009.29,720.71 LQ_KXXP1.4
E4: LQ_KXXP1.5 TF卡槽.2 | length 1011.6
  Top Layer w10: TF卡槽.2 155.71,959.29 ccw(c226.42,1030) 226.42,930 838.58,930 cw(c838.58,830) 909.29,900.71 cw(c871.36,862.78) 925,862.78 LQ_KXXP1.5
E5: LQ_KXXP1.6 TF卡槽.1 | length 1165.5
  Top Layer w10: TF卡槽.1 75.71,939.29 ccw(c146.42,1010) 146.42,910 788.58,910 cw(c788.58,810) 859.29,880.71 cw(c809.29,830.71) 880,830.71 880,791.42 ccw(c980,791.42) 909.29,720.71 LQ_KXXP1.6
E6: LQ_KXXP1.7 陀螺仪.3 | length 634.4
  Top Layer w10: 陀螺仪.3 cw(c376.21,540) 350.61,565.61 390.71,605.71 cw(c461.42,535) 461.42,635 706.72,635 ccw(c706.72,703.28) 755,655 ccw(c706.72,703.28) 775,703.28 775,713.58 cw(c875,713.58) 804.29,784.29 LQ_KXXP1.7
E7: LQ_KXXP1.8 陀螺仪.4 | length 747.2
  Top Layer w10: 陀螺仪.4 280.71,499.29 ccw(c351.42,570) 351.42,470 421.72,470 ccw(c421.72,538.28) 470,490 ccw(c421.72,538.28) 490,538.28 490,553.79 cw(c541.21,553.79) 504.99,589.99 507.32,592.32 cw(c550,549.64) 550,610 725,610 ccw(c725,706.57) 793.28,638.28 800.25,645.25 ccw(c740.5,705) LQ_KXXP1.8
GND: 0.1uf.1@-635,175 0.1uf.1@-720,-250 0.1uf.1@-800,-1045.32 0.1uf.1@-1250,225 0.1uf.1@-1325,-245 0.1uf.1@-1335,-25 0.1uf.1@-1440,-245 0.1uf.1@-1970,85 0.1uf.1@-1985,130 0.1uf.1@-2040,-110 0.1uf.2@-745,-5 0.1uf.2@-1345,225 0.1uf.2@-1445,-1095.32 0R.1 1k.1 3.3k.1 5.1k.1 10uf.2 22uf.2 74HC244.1 74HC244.3 74HC244.5 74HC244.7 74HC244.8 74HC244.9 74HC244.10 74HC244.11 74HC244.12 74HC244.13 74HC244.15 74HC244.17 74HC244.19 1117.1 2200uf.1 2940.2 7350.1 7350.2 j3y.2 LM2940.2 LM2941.2 LM2941.3 LQ_KXXP1.41 LQ_KXXP1.43 P1.9 P1.10 P1.11 P1.12 P1.13 P1.14 P1.15 P1.16 P2.1 P3.2 P5.10 P6.2 P6.7 TF卡槽.8 无线通信接口1.8 编码器接口.1 舵机PWM.3 蓝牙接口.2 超声波发射.2 超声波接收.2 陀螺仪.2 陀螺仪.7
  other v1: 1755,-1435 2070,-1435 2390,-1435 -1165,-1425 -975,-1425 -780,-1425 2295,-1095 1970,-975 -570,-960 600,-920 2295,-920 -1615,-870 -180,-135 305,-135 690,-135 305,0 160,205 305,205 -180,325 -1590,360 -1295,590 -1845,765 1600,1075
GND_P: 0R.2 Moter1.1 Power1.1
IRQ: LQ_KXXP1.100 无线通信接口1.4 | length 1820.4
  Top Layer w10: 无线通信接口1.4 1223.82,-1305.71 cw(c1153.11,-1235) 1153.11,-1335 cw(c1153.11,-1255.07) 1096.59,-1311.59 754.29,-969.29 cw(c825,-898.58) 725,-898.58 725,-541.42 cw(c825,-541.42) 754.29,-470.71 870.71,-354.29 cw(c941.42,-425) 941.42,-325 1213.58,-325 cw(c1213.58,-425) 1284.29,-354.29 LQ_KXXP1.100
MCU3.3V: 0.1uf.2@-635,85 10uf.1@-732,82 1117.2@-940,90.83 LQ_KXXP1.45 | length 663
  Bottom Layer w30: 1117.2@-940,90.83 -940,55 -890,5 -809,5 -732,82 -398,82 LQ_KXXP1.45
MISO: LQ_KXXP1.87 无线通信接口1.5 | length 1298.3
  Top Layer w10: LQ_KXXP1.87 945.71,-681.77 ccw(c875,-611.06) 975,-611.06 975,-606.42 ccw(c875,-606.42) 945.71,-535.71 945,-535 ccw(c884.64,-595.36) 884.64,-510 800.15,-510 ccw(c800.15,-546.57) 774.29,-520.71 ccw(c845,-591.42) 745,-591.42 745,-844.05 ccw(c845,-844.05) 774.29,-914.76 无线通信接口1.5
MOSI: LQ_KXXP1.88 无线通信接口1.3 | length 1138.1
  Top Layer w10: LQ_KXXP1.88 878.89,-548.89 ccw(c833.28,-594.5) 833.28,-530 ccw(c833.28,-598.28) 785,-550 ccw(c833.28,-598.28) 765,-598.28 765,-833.58 ccw(c865,-833.58) 794.29,-904.29 1104.79,-1214.79 ccw(c1153.58,-1166.01) 1153.58,-1235 ccw(c1153.58,-1135) 1224.29,-1205.71 无线通信接口1.3
NetD1_2: 3.3k.2@-950,1145 D1.2 | length 113
  Top Layer w50: D1.2 3.3k.2@-950,1145
NetD2_2: 5.1k.2@710,-1385 D2.2 | length 93
  Top Layer w50: 5.1k.2@710,-1385 D2.2
NetD3_2: 5.1k.2@-750,1035 D3.2 | length 111.2
  Top Layer w30: 5.1k.2@-750,1035 -747.02,1037.98 D3.2
NetD4_2: 3.3k.2@1490,-1075 D4.2 | length 91.2
  Top Layer w30: D4.2 1487.02,-1072.02 3.3k.2@1490,-1075
NetMoter1_2: Moter1.2 S2.3 | length 763.9
  Top Layer w100: S2.3 -1985,-845 -1985,-1220 Moter1.2
NetPower1_2: Power1.2 S1.2 | length 354.7
  Top Layer w100: Power1.2 -2305,-1235 S1.2
NetQ1_1: 1k.2@-790.01,691.68 100R.2 j3y.1 | length 379.3
  Bottom Layer w30: j3y.1 -975.43,709.57 -890,795 100R.2 -795.01,696.68 1k.2@-790.01,691.68
NetQ1_3: j3y.3 蜂鸣器.2 | length 160.3
  Bottom Layer w30: j3y.3 -936.06,571.06 -869.02,504.02 蜂鸣器.2
NetR2_1: 1k.2@-1355,715 10k.1 LM2941.1 | length 335.8
  Top Layer w50: LM2941.1 -1492.09,707.91 10k.1 1k.2@-1355,715
PCLK: LQ_KXXP1.81 P6.8 | length 2573.7
  Bottom Layer w10: LQ_KXXP1.81 604.29,-674.29 cw(c675,-603.58) 575,-603.58 575,-595.36 ccw(c489.64,-595.36) 550,-535 ccw(c501.72,-583.28) 501.72,-515 460.36,-515 ccw(c460.36,-600.36) 400,-540 ccw(c460.36,-600.36) 375,-600.36 375,-693.58 ccw(c475,-693.58) 404.29,-764.29 460.71,-820.71 ccw(c531.42,-750) 531.42,-850 2113.58,-850 ccw(c2113.58,-750) 2184.29,-820.71 P6.8
SCK: LQ_KXXP1.85 无线通信接口1.6 | length 618.2
  Top Layer w10: LQ_KXXP1.85 825,-823.58 ccw(c925,-823.58) 854.29,-894.29 无线通信接口1.6
SERVO: 74HC244.14 舵机PWM.1 | length 2264.6
  Top Layer w10: 舵机PWM.1 ccw(c-1283.79,1005) -1309.39,979.39 -964.29,634.29 ccw(c-893.58,705) -893.58,605 -376.42,605 cw(c-376.42,505) -305.71,575.71 v2(-169.29,439.29) ; v2(620,410) 74HC244.14
  Bottom Layer w10: v2(-169.29,439.29) ccw(c-98.58,510) -98.58,410 v2(620,410)
UART0_RX: LQ_KXXP1.116 超声波接收.4 | length 763.8
  Bottom Layer w10: 超声波接收.4 1145.71,1044.29 cw(c1075,973.58) 1175,973.58 1175,506.21 ccw(c1226.21,506.21) 1190,470 ccw(c1226.21,506.21) 1226.21,455 1233.58,455 cw(c1233.58,355) 1304.29,425.71 LQ_KXXP1.116
UART0_TX: LQ_KXXP1.115 超声波接收.3 | length 720.1
  Bottom Layer w10: 超声波接收.3 1045.71,1044.29 cw(c975,973.58) 1075,973.58 1075,703.28 ccw(c1143.28,703.28) 1095,655 1116.72,633.28 cw(c1048.43,565) 1145,565 1145,526.42 ccw(c1245,526.42) 1174.29,455.71 LQ_KXXP1.115
UART3_RX: LQ_KXXP1.80 P6.6 | length 1864.4
  Bottom Layer w10: LQ_KXXP1.80 504.29,-615.71 ccw(c575,-686.42) 475,-686.42 475,-695 ccw(c559.5,-695) 499.75,-754.75 545.71,-800.71 ccw(c616.42,-730) 616.42,-830 1933.58,-830 ccw(c1933.58,-730) 2004.29,-800.71 P6.6
UART3_TX: LQ_KXXP1.79 P6.5 | length 1564.6
  Bottom Layer w10: LQ_KXXP1.79 610.71,-780.71 ccw(c681.42,-710) 681.42,-810 1853.58,-810 ccw(c1853.58,-710) 1924.29,-780.71 P6.5
UART5_RX: LQ_KXXP1.10 蓝牙接口.3 | length 1215
  Top Layer w10: 蓝牙接口.3 -129.29,894.29 ccw(c-58.58,965) -58.58,865 523.58,865 cw(c523.58,765) 594.29,835.71 LQ_KXXP1.10
UART5_TX: LQ_KXXP1.9 蓝牙接口.4 | length 1073.6
  Top Layer w10: 蓝牙接口.4 -54.29,919.29 ccw(c16.42,990) 16.42,890 598.58,890 cw(c598.58,790) 669.29,860.71 LQ_KXXP1.9
VSY: LQ_KXXP1.82 P6.3 | length 1301.5
  Bottom Layer w10: LQ_KXXP1.82 790.71,-760.71 ccw(c861.42,-690) 861.42,-790 1698.58,-790 ccw(c1698.58,-690) 1769.29,-760.71 1787.32,-742.68 ccw(c1744.64,-700) P6.3
pads on no net: 10k.3 1117.4 2940.4 7350.8 Designator36.1 Designator46.1 Designator48.1 Designator51.1 Designator52.1 LM2940.4 LM2941.6 LQ_KXXP1.15 LQ_KXXP1.16 LQ_KXXP1.17 LQ_KXXP1.18 LQ_KXXP1.19 LQ_KXXP1.20 LQ_KXXP1.21 LQ_KXXP1.22 LQ_KXXP1.23 LQ_KXXP1.24 LQ_KXXP1.25 LQ_KXXP1.26 LQ_KXXP1.31 LQ_KXXP1.33 LQ_KXXP1.34 LQ_KXXP1.37 LQ_KXXP1.38 LQ_KXXP1.39 LQ_KXXP1.40 LQ_KXXP1.42 LQ_KXXP1.44 LQ_KXXP1.61 LQ_KXXP1.99 LQ_KXXP1.111 P6.4 S1.1 S2.1 编码器接口.5 编码器接口.6 超声波发射.4 陀螺仪.5 陀螺仪.6 陀螺仪.8

## Polygon pours and split planes (outlines as drawn)
GND on Bottom Layer "4" (solid, remove dead copper, pour order 10): -2575,-1505 -2575,1570 3355,1570 3175,1570 3175,-1865
GND_P on Bottom Layer "2" (solid, remove dead copper, pour order 4): -2575,-1505 -2575,-1205 -1320,-1205 -1320,-1507.05
GND on Top Layer "3" (solid, remove dead copper, pour order 8): -2575,-1505 -2575,1380 2610,1380 2660,1380 2660,-1620
GND_P on Top Layer "1" (solid, remove dead copper, pour order 6): -2575,-1505 -2575,-1205 -1320,-1205 -1320,-1507.05

## Keep-outs
Keep-Out Layer:
  lines w10: -2575,-1457.05 ccw(c-2525,-1457.05) -2525,-1507.05 -610,-1507.05 ccw(c-610,-1457.05) -563.01,-1474.13 -490.29,-1166.19 cw(c0,-1512.05) 490.29,-1166.19 562.21,-1471.75 ccw(c610,-1457.05) 610,-1507.05 2525,-1507.05 ccw(c2525,-1457.05) 2575,-1457.05 2575,-707.05 2397.94,-88.64 ccw(c2210,-157.05) 2373.83,-42.33 2186.79,257.95 cw(c2360,357.95) 2160,357.95 2160,657.95 ccw(c2120,657.95) 2120,697.95 2000,697.95 1682.36,1178.58 ccw(c1614.17,1139.21) 1614.17,1217.95 -1614.17,1217.95 ccw(c-1614.17,1139.21) -1682.36,1178.58 -2373.83,-42.33 ccw(c-2210,-157.05) -2397.94,-88.64 -2575,-707.05 -2575,-1457.05

## Other copper
Top Layer:
  text "NEUQ    2017.6.9" at -1210,-1055 h80
  text "东秦光电追逐一队" at -1215.55,-1134.49 h80
  text "倪放翊       刘洪瑞" at -1215,-1220 h80
  text "张    宽       章敏俊" at -1215,-1305 h80

## Silkscreen, mask and mechanical layers (free items; w line width, h text height)
Top Overlay:
  text "Design By Ni" at 1600,-385 h60
Top Solder:
  text "NEUQ    2017.6.9" at -1210,-1055 h80
  text "东秦光电追逐一队" at -1215.55,-1134.49 h80
  text "倪放翊       刘洪瑞" at -1215,-1220 h80
  text "张    宽       章敏俊" at -1215,-1305 h80

## Text inside footprints (layer, text, board x,y; h text height)
10uf: Top Overlay "+" at -1773,833 h60 r270
10uf: Top Overlay "+" at -820,-40 h60 r270
10uf: Top Overlay "+" at -1215,-44 h60 r270
10uf: Bottom Overlay "+" at -930,-1070.32 h60 r90
10uf: Bottom Overlay "+" at -1325,-1070.32 h60 r270
10uf: Bottom Overlay "+" at -1565,-220 h60 r90
10uf: Bottom Overlay "+" at -1965,-140 h60 r90
10uf: Bottom Overlay "+" at -840,-275 h60 r90
10uf: Bottom Overlay "+" at -1245,-275 h60 r90
10uf: Bottom Overlay "+" at -755,150 h60 r90
10uf: Bottom Overlay "+" at -1170,150 h60 r90
10uf: Bottom Overlay "+" at -1425,155 h60 r270
10uf: Bottom Overlay "+" at -1855,155 h60 r270
22uf: Top Overlay "+" at -1998,383 h60 r270
7350: Bottom Overlay "4" at -1828.15,240.47 h21.77 r180; Bottom Overlay "5" at -1512.68,240.47 h21.77 r180; Bottom Overlay "8" at -1512.68,90.87 h21.77 r180; Bottom Overlay "1" at -1815.12,90.87 h21.77 r180
编码器接口: Top Overlay "6" at 575,-1285 h30; Top Overlay "5" at 575,-1185 h30; Top Overlay "2" at 935,-1280 h30; Top Overlay "1" at 940,-1190 h30